# Altium PCB Robot_ball_Pcb.PcbDoc
Units mm, origin at the board's own origin, x right, y up, seen from the top; angles counter-clockwise.
Board outline 32.51 x 43.31 mm, 2 copper layers (Top Layer, Bottom Layer); 14 components, 13 nets, 52 pads, 0 vias.
Unrouted connection lines stored in the file: 1.
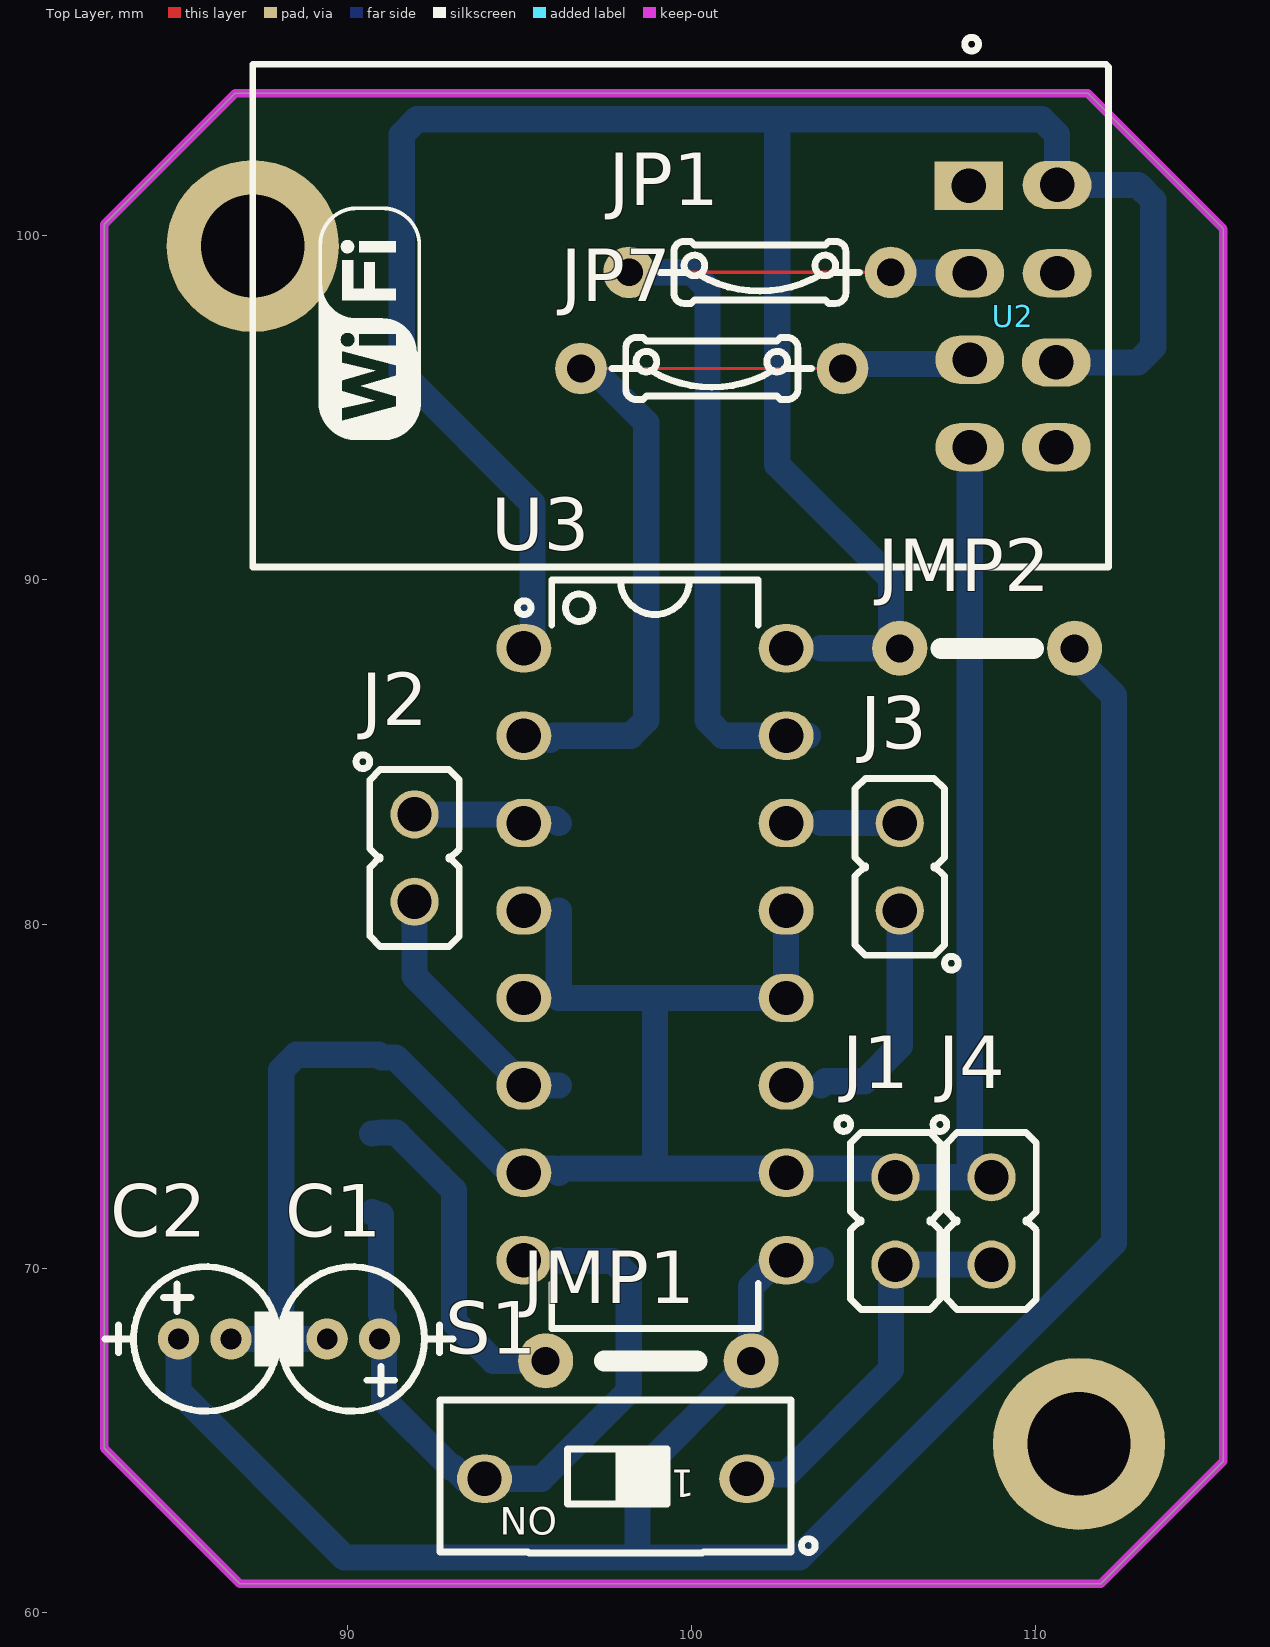
[diagram p0: Top Layer view]
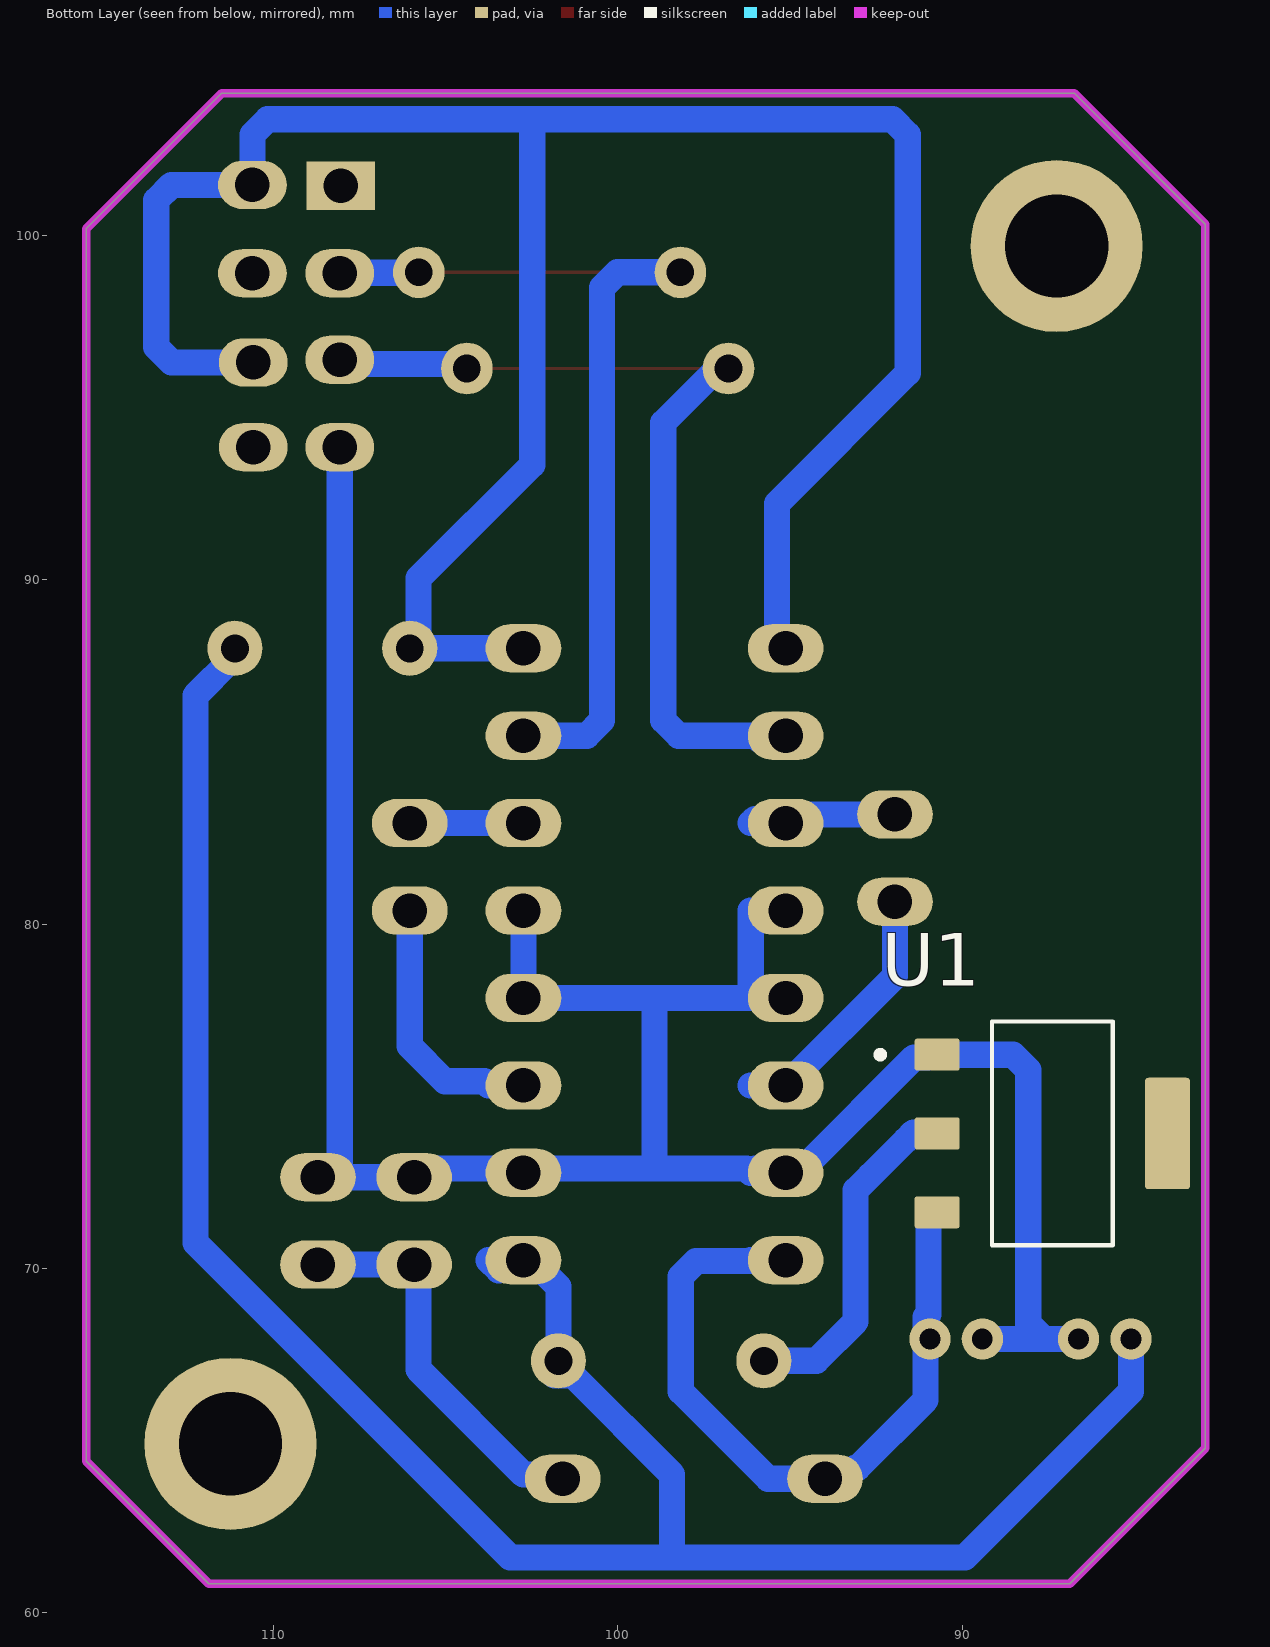
[diagram p1: Bottom Layer view, seen from below]
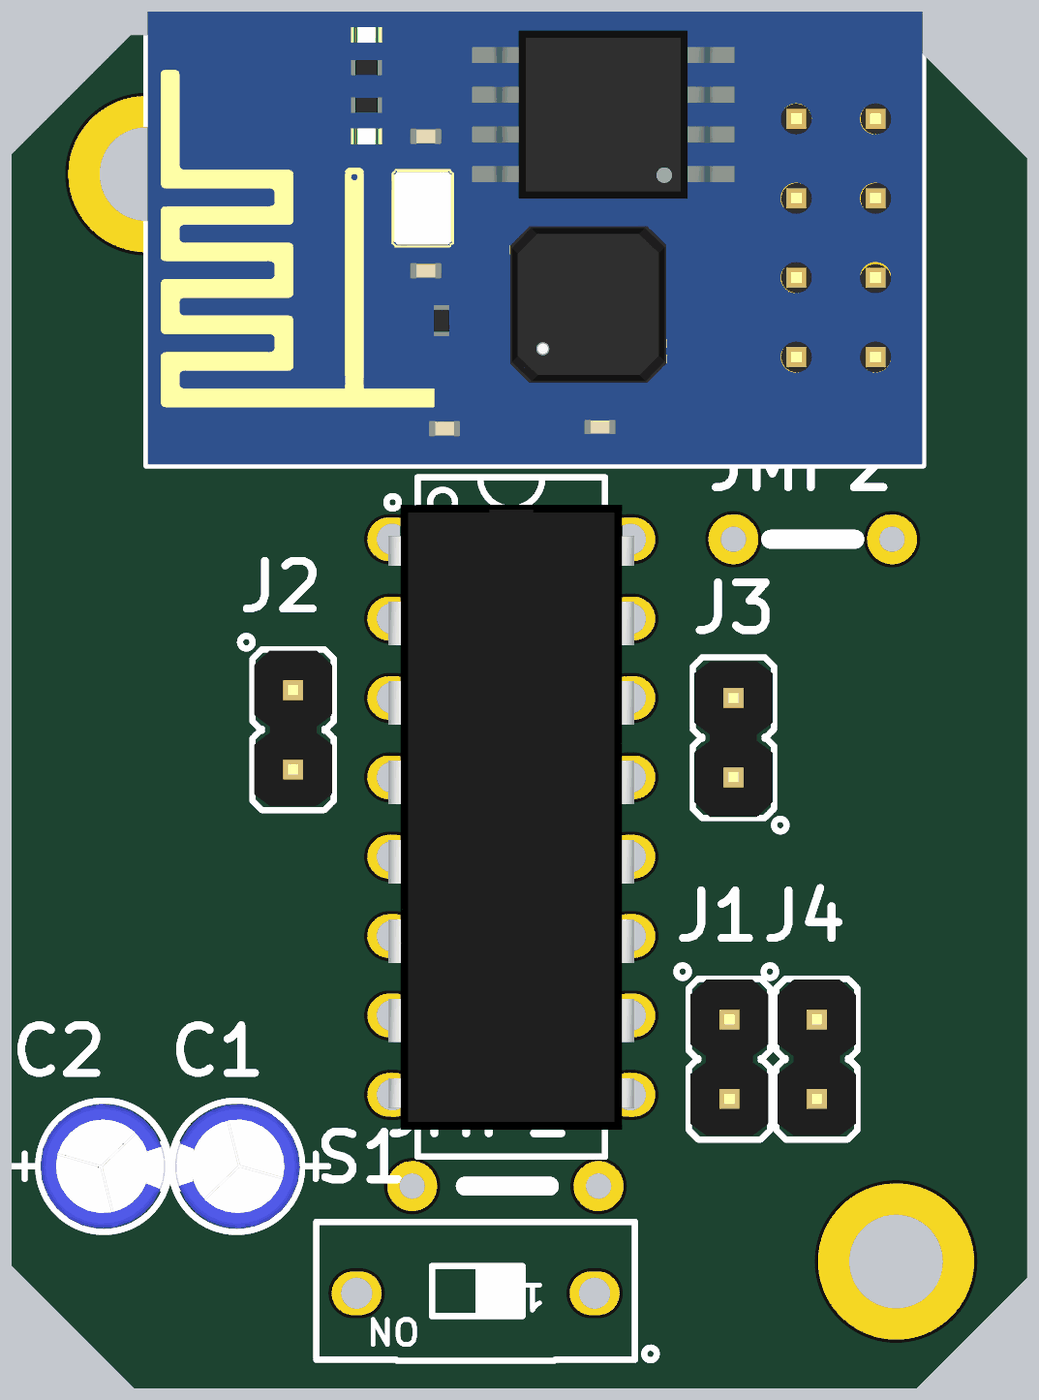
[diagram p2: 3D render of the assembled board from above, using the file's embedded part models]

## Layer stack, top to bottom
Top Solder: solder mask 0.0102, Solder Resist, Dk 3.5
Top Layer: signal copper 0.0356
Dielectric 1: dielectric 0.32, FR-4, Dk 4.8
Bottom Layer: signal copper 0.0356
Bottom Solder: solder mask 0.0102, Solder Resist, Dk 3.5

## Board outline
82.931,64.77 86.868,60.833 111.887,60.833 115.443,64.389 115.443,100.203 111.506,104.14 86.741,104.14 82.931,100.33

## Design rules (kind name [scope] priority, off if disabled: settings)
Clearance [All] p1: gap=0.254 ignorepadtopadclearanceinfootprint=FALSE except(0: Arc-Hole Track-Hole SMDPad-Hole THPad-Hole Via-Hole Fill-Hole Poly-Hole Region-Hole Text-Hole)
ComponentClearance InComponent('U2') [All] p1: gap=0 collisioncheckmode=3 verticalgap=0 showdistances=FALSE
ComponentClearance [All] p2: gap=0.254 collisioncheckmode=3 verticalgap=0.254 showdistances=FALSE
PolygonConnect [All] p1: connectstyle=Relief reliefconductorwidth=0.254 reliefentries=4 polygonreliefangle="90 Angle" airgapwidth=0.254
RoutingVias [All] p1: holewidth=0.711 width=1.27 viastyle="Through Hole" minholewidth=0.711 minwidth=1.27 maxholewidth=0.711 maxwidth=1.27
SolderMaskExpansion [All] p1: expansion=0.102 istentingtop=FALSE
Width [All] p1: maxlimit=0.762 minlimit=0.254 preferedwidth=0.762 toplayer_maxwidth=0.254 toplayer_prefwidth=0.254 bottomlayer_minwidth=0.762 minimp=50.000000 maximp=50.000000 favimp=50.000000
29 further rules are at their usual default settings.

## Components (designator, comment, footprint, x,y, rotation, side; value= is the part's Value field where it differs from the comment)
C1 "100uF" C_EL_4X7 90.17,67.945 r180 top
C2 "100uF" C_EL_4X7 85.852,67.945 r0 top
J1 "HDRM2" HDR_M_1X2 105.918,71.374 r270 top
J2 "HDRM2" HDR_M_1X2 91.948,81.915 r270 top
J3 "HDRM2" HDR_M_1X2 106.045,81.661 r90 top
J4 "HDRM2" HDR_M_1X2 108.712,71.374 r270 top
JMP1 "SMD solder <b>JUMPER</b>" J0508-200#1 98.806,67.31 r0 top
JMP2 "SMD solder <b>JUMPER</b>" J0508-200#2 108.585,88.011 r0 top
JP1 "JP_RES0" JP_RES0_AX3 101.981,98.933 r180 top net-tie
JP7 "JP_RES0" JP_RES0_AX3 100.584,96.139 r180 top net-tie
S1 "DIPSW2" DIPSW254_2 97.79,65.151 r180 top
U1 "AMS1117-3.3" SOT229P700X180-4N 87.376,73.914 r180 bottom
U2 "ESP-01" ESP8266_ESP01 109.334,97.663 r90 top
U3 "L293D" DIP_16 98.933,79.121 r0 top

## Footprints (in the part's own frame and the unit in brackets; to place one, negate y for a bottom-side part, rotate by r counter-clockwise, add the part's x,y. Pads: shape width x height; smd on the part's side, far side on the other; paste and mask are expansions set on the pad)
C_EL_4X7 [mm] "Cap Elec, D4.0X7.0H pitch: 1.5mm"
  round 1.2 hole 0.6: 1(-0.762,0) 2(0.762,0)
  silkscreen extent -2.9,-2.1 2.13,2.1, body extent -2,-2 2,2, height 1
DIP_16 [mm] "DIP, pitch 2.54mm, 300mil Width"
  oval 1.6x1.4 / inner round 1.4 / far side oval 2.2x1.4 hole 1: 1(-3.81,8.89) 2(-3.81,6.35) 3(-3.81,3.81) 4(-3.81,1.27) 5(-3.81,-1.27) 6(-3.81,-3.81) 7(-3.81,-6.35) 8(-3.81,-8.89) 9(3.81,-8.89) 10(3.81,-6.35) 11(3.81,-3.81) 12(3.81,-1.27) 13(3.81,1.27) 14(3.81,3.81) 15(3.81,6.35) 16(3.81,8.89)
  silkscreen extent -4,-10.87 3,10.87, body extent -3.93,-10 3.94,10, height 5.1
DIPSW254_2 [mm] "SWITCH DIP 2POS, THD, 2.54mm, SD02"
  oval 1.6x1.4 / inner round 1.4 / far side oval 2.2x1.4 hole 1: 1(-3.81,1.27) 4(3.81,1.27)
  silkscreen extent -5.8,-1.02 5.1,3.43
ESP8266_ESP01 [mm] "ESP8266 ESP-01 Wi07C"
  rect 1.4x2 hole 1: 1(3.785,1.283)
  oval 1.4x2 hole 1: 2(3.81,-1.283) 3(1.245,1.257) 4(1.245,-1.283) 5(-1.27,1.257) 6(-1.346,-1.257) 7(-3.81,1.257) 8(-3.81,-1.257)
  silkscreen extent -7.29,-2.78 8.1,22.09, body extent -7.26,-2.76 7.24,22.04, height 5.8
HDR_M_1X2 [mm] "Connector; Header; 2 Position"
  round 1.4 / inner round 1.4 / far side oval 1.4x2.2 hole 1 mask+0.1: 1(-1.27,0) 2(1.27,0)
  silkscreen extent -3,-1.7 2.57,1.3, body extent -2.54,-1.25 2.44,1.25, height 8.72
J0508-200#1 [mil] "5.08 mm (200mil) Jumper wire"
  round 63 hole 32: 1(-120,0) 2(115,0)
  silkscreen extent -53,0 53,0, body extent -114,-14 114,14, height 33
J0508-200#2 [mil] "5.08 mm (200mil) Jumper wire"
  round 63 hole 32: 1(-100,0) 2(100,0)
  silkscreen extent -53,0 53,0, body extent -114,-14 114,14, height 33
JP_RES0_AX3 [mm] "JUMPER, RESISTOR 0 Ohm 1/8Watt, Axial0.3Inch"
  round 1.5 hole 0.8: 1(-3.8,0) 2(3.8,0)
  Top Layer lines w0.1: 3.8,0 -3.8,0
  silkscreen extent -2.9,-0.9 2.9,0.9, body extent -4.21,-1.2 4.21,1.2, height 2.5
SOT229P700X180-4N [mm]
  rrect15% 1.31x0.93 smd: 1(-3.345,2.29) 2(-3.345,0) 3(-3.345,-2.29)
  rrect15% 1.31x3.24 smd: 4(3.345,0)
  silkscreen extent -5.1,-3.25 1.75,3.25, body extent -3.25,-3.5 3.25,3.5, height 1.8

## Part data
C1 C2: library part CAP_THD_EL, "CAP, THD, ELEC,", ASSEMBLY=ASSEMBLY, DESC=DESCRIPTION, DIST#=MOUSER, MANF=MANF, MANF_P#=MANF_PART#, PARAM=25V, PARAM2=20%, PRICE="10= 5$"
J1 J2 J3 J4: library part HDR_M_1X2, "CONN, HEADER, Male, pitch: 2.54mm, 2POS"
JMP1 JMP2: library part JUMPER, "IMAX-CO.com"
JP1 JP7: library part JUMPER_RES_3, "JUMPER, RESISTOR 0 Ohm", MANF=MANF, MANF_P#=MANF_P#
S1: library part SWDIP_2P_THD, "SWITCH, DIP, 2P, THD", MANF=MANF, MANF_P#=MANF_P#
U1: "Sot223/Pkg 1-Amp 3.3-Volt Low Drop Out Voltage Regulatator", Package="SOT-223 Seeed Technology", Check_prices=https://www.snapeda.com/parts/AMS1117-3.3/Advanced+Monolithic+Systems/view-part/?ref=eda, MF="Advanced Monolithic Systems", MP=AMS1117-3.3, SnapEDA_Link=https://www.snapeda.com/parts/AMS1117-3.3/Advanced+Monolithic+Systems/view-part/?ref=snap
U2: library part ESP8266_ESP-01, "ESP8266 ESP-01 WiFi Module", MANF_P#=ESP-01
U3: library part L293D_DIP16, "Driver, Dual Full Bridge, PUSH-PULL", MANF=ST, MANF_P#=L293D, PARAM="2A, 36V"

## Free pads (board coordinates)
  round 5 hole 3: 2(87.249,99.695) 2(111.252,64.897)

## Nets (pads, with @x,y where several pads share a name; then routed paths per layer and width w, separated by ;. In a path a pad name is that pad's centre, name@x,y a point inside that pad or via, vN(x,y) a via of type N, cw(c..) or ccw(c..) an arc to the next point about the centre after c; other vN are vias at no path point)
Battery-voltage: C1.1 S1.4 U1.3 U3.8 | length 19.6
  Bottom Layer w0.762: U1.3 90.975,71.54 90.975,68.664 91.059,68.58 91.059,68.072 91.059,66.167 93.026,64.2 93.088,64.2 93.407,63.881 S1.4 ; S1.4@94.742,63.881 95.631,63.881 98.171,66.421 98.171,69.761 97.725,70.207 96.163,70.207 U3.8@96.139,70.231
charger: J1.2 J4.2 S1.1 | length 11.3
  Bottom Layer w0.762: S1.1 101.722,64.003 102.738,64.003 105.791,67.056 J1.2@105.791,70.104 ; J1.2 J4.2
GND: C1.2 C2.2 J1.1 J4.1 U1.1 U2.7 U3.4 U3.5 U3.7 U3.10 U3.12 U3.13 | length 70.7
  Bottom Layer w0.762: C2.2 87.628,67.945 ; C1.2 87.628,67.945 ; U1.1 88.521,76.204 88.075,75.758 88.075,68.391 87.628,67.945 ; U1.1@90.911,76.204 90.995,76.12 91.393,76.12 94.524,72.989 94.905,72.989 U3.7 ; U3.7@94.874,72.893 96.017,72.893 96.139,72.771 96.261,72.893 98.928,72.893 98.933,72.898 ; U3.4@96.139,80.391 96.139,77.851 98.933,77.851 ; U3.13 U3.12 98.933,77.851 ; J1.1 J4.1 ; J1.1@105.918,72.893 102.786,72.893 102.781,72.898 98.933,72.898 ; J4.1@108.077,73.025 U2.7 ; 98.933,72.898 98.933,77.851
in_m_r1: JP1.1 U2.3 | length 2.3
  Bottom Layer w0.762: JP1.1 105.794,98.92 108.064,98.92 U2.3
in_m_r2: JP7.1 U2.5 | length 3.8
  Bottom Layer w0.762: JP7.1 104.516,96.271 107.955,96.271 U2.5
NetJ2_1: J2.1 U3.3 | length 3.5
  Bottom Layer w0.762: J2.1@92.71,83.185 95.034,83.185 95.166,83.053 96.017,83.053 U3.3@96.139,82.931
NetJ2_2: J2.2 U3.6 | length 7.7
  Bottom Layer w0.762: J2.2 91.948,78.486 U3.6 U3.6@96.139,75.311
NetJ3_1: J3.1 U3.11 | length 6.7
  Bottom Layer w0.762: U3.11@103.759,75.311 103.881,75.433 105.024,75.433 106.045,76.454 J3.1
NetJ3_2: J3.2 U3.14 | length 2.3
  Bottom Layer w0.762: U3.14@103.759,82.931 J3.2
NetJMP1_1: JMP1.1 U1.2 | length 10.5
  Bottom Layer w0.762: U1.2 90.995,73.943 91.411,73.943 91.635,73.719 92.67,72.684 93.091,72.263 93.091,68.453 94.234,67.31 96.139,67.31 JMP1.1@96.042,67.407
NetJP1_2: JP1.2 U3.15 | length 18.1
  Bottom Layer w0.762: JP1.2 100.011,98.933 100.457,98.487 100.457,85.917 100.903,85.471 U3.15@103.378,85.471
NetJP7_2: JP7.2 U3.2 | length 14.2
  Bottom Layer w0.762: U3.2@95.885,85.349 96.007,85.471 98.233,85.471 98.679,85.917 98.679,94.562 97.243,95.998 96.925,95.998 JP7.2
vcc: C2.1 JMP1.2 JMP2.1 JMP2.2 U2.2 U2.6 U3.1 U3.9 U3.16 | length 129.6
  Bottom Layer w0.762: C2.1 85.09,66.421 89.916,61.595 98.425,61.595 ; U3.1@95.377,88.011 95.377,92.209 91.574,96.012 91.574,102.932 92.021,103.378 102.489,103.378 ; JMP1.2 101.727,69.466 102.492,70.231 U3.9@102.997,70.231 ; JMP1.2@101.843,66.891 101.308,66.891 98.425,64.008 98.425,61.595 ; U3.9@103.462,69.936 103.757,70.231 U3.9@103.759,70.231 ; U3.16@103.759,88.011 JMP2.1@105.791,88.011 ; JMP2.1@105.918,88.011 JMP2.1@105.791,88.011 ; U2.6 112.965,96.317 113.411,96.763 113.411,101.027 112.965,101.473 U2.2 110.617,102.932 110.171,103.378 102.489,103.378 ; JMP2.2@111.202,87.707 112.268,86.641 112.268,70.739 103.124,61.595 98.425,61.595 ; 102.489,103.378 102.489,93.345 105.791,90.043 JMP2.1@105.791,88.011
pads on no net: U1.4 U2.1 U2.4 U2.8

## Keep-outs
Keep-Out Layer:
  the board outline again, w0.254

## Text inside footprints (layer, text, board x,y; h text height)
S1: Top Overlay "ON" at 96.09,63.051 h0.8 r180; Top Overlay "1" at 100.09,64.151 h0.8 r180